# Altium PCB ESC.PcbDoc
Units mm, origin at the board's own origin, x right, y up, seen from the top; angles counter-clockwise.
Board outline 24 x 14 mm, 4 copper layers (Top Layer, GND, POWER, Bottom Layer), stack 0.778 mm thick; 43 components, 36 nets, 184 pads, 99 vias.
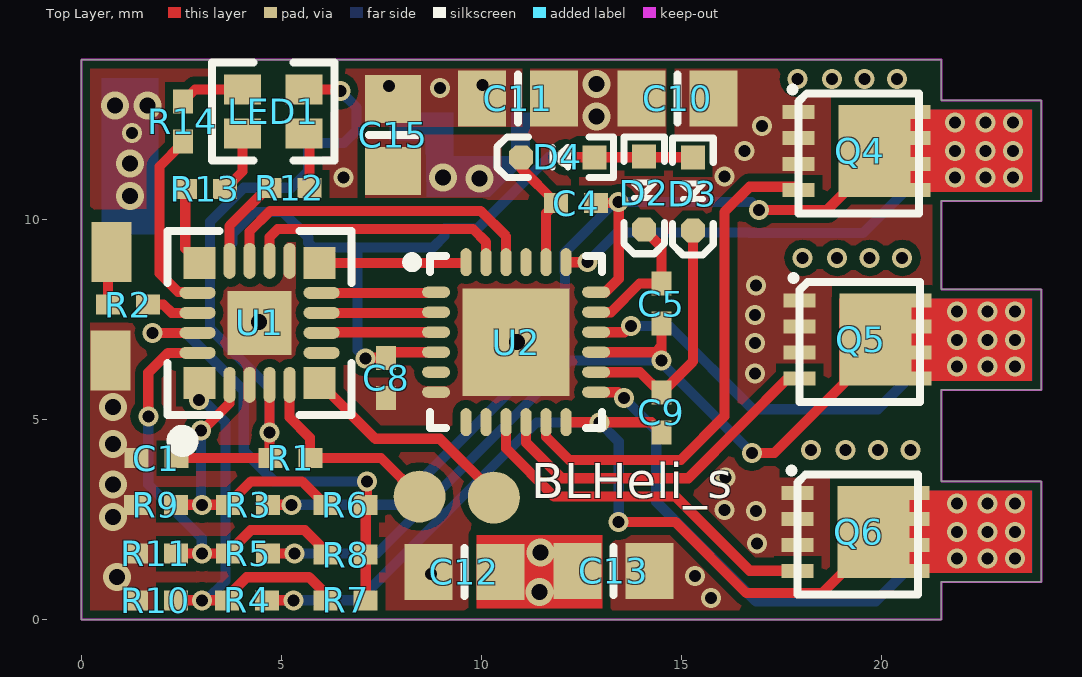
[diagram p0: Top Layer view]
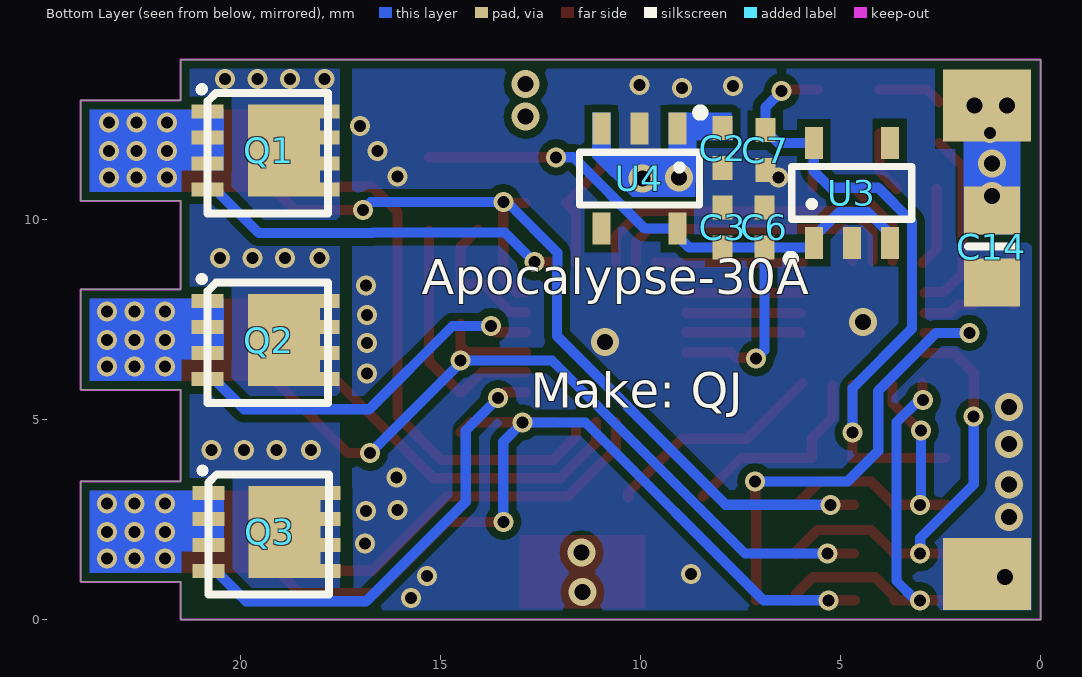
[diagram p1: Bottom Layer view, seen from below]
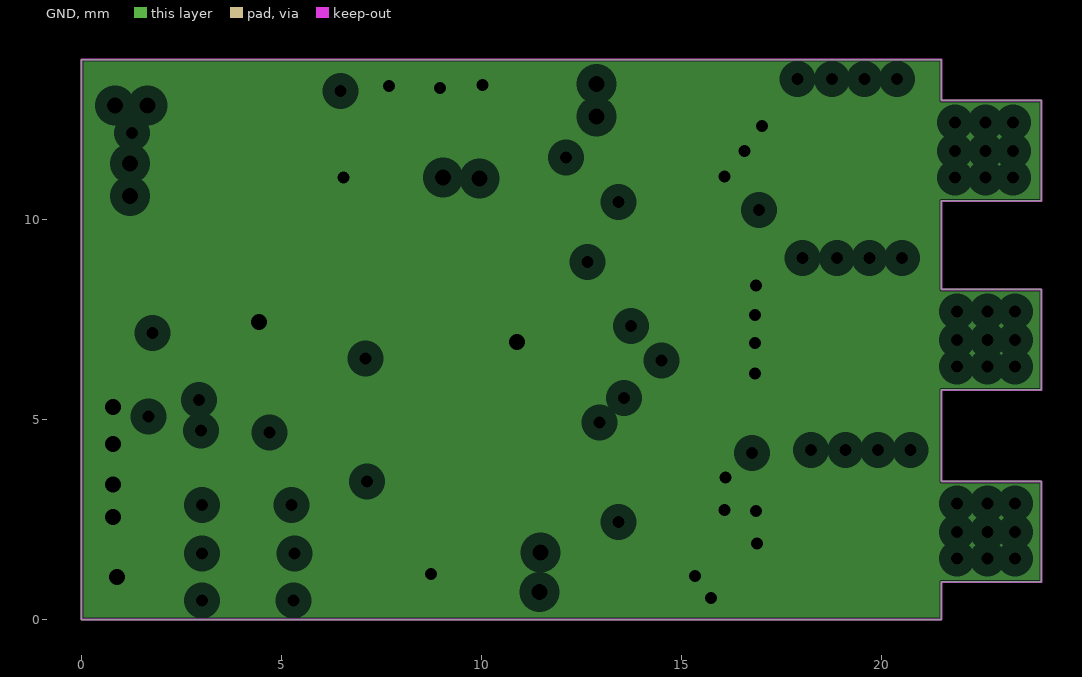
[diagram p2: GND, clearances drawn from the general rule]
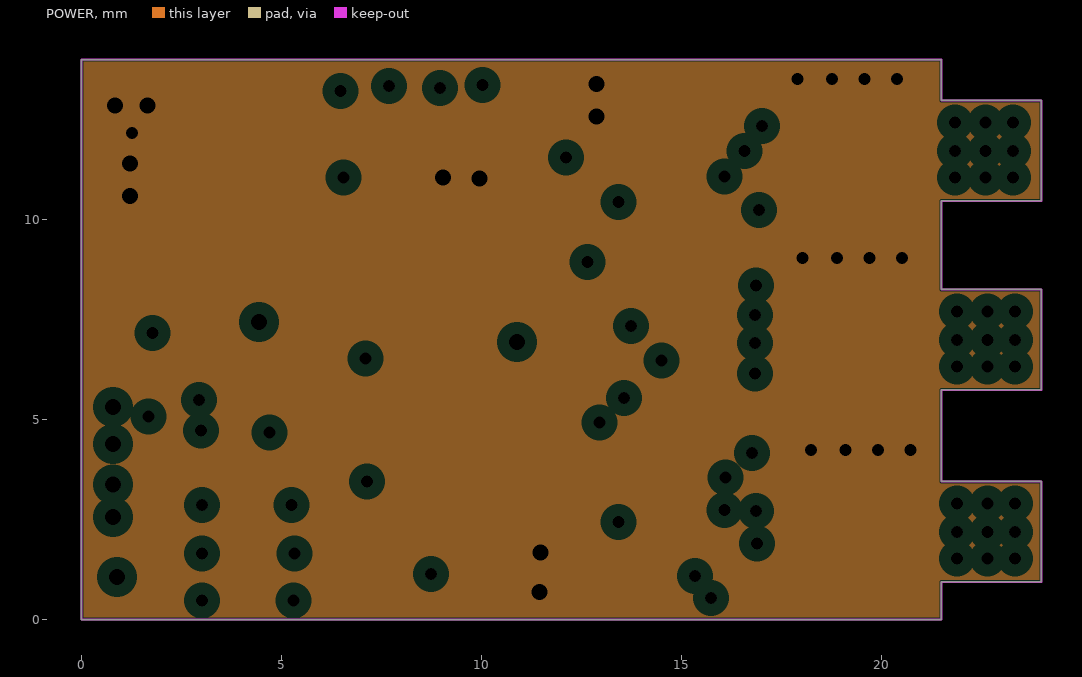
[diagram p3: POWER, clearances drawn from the general rule]
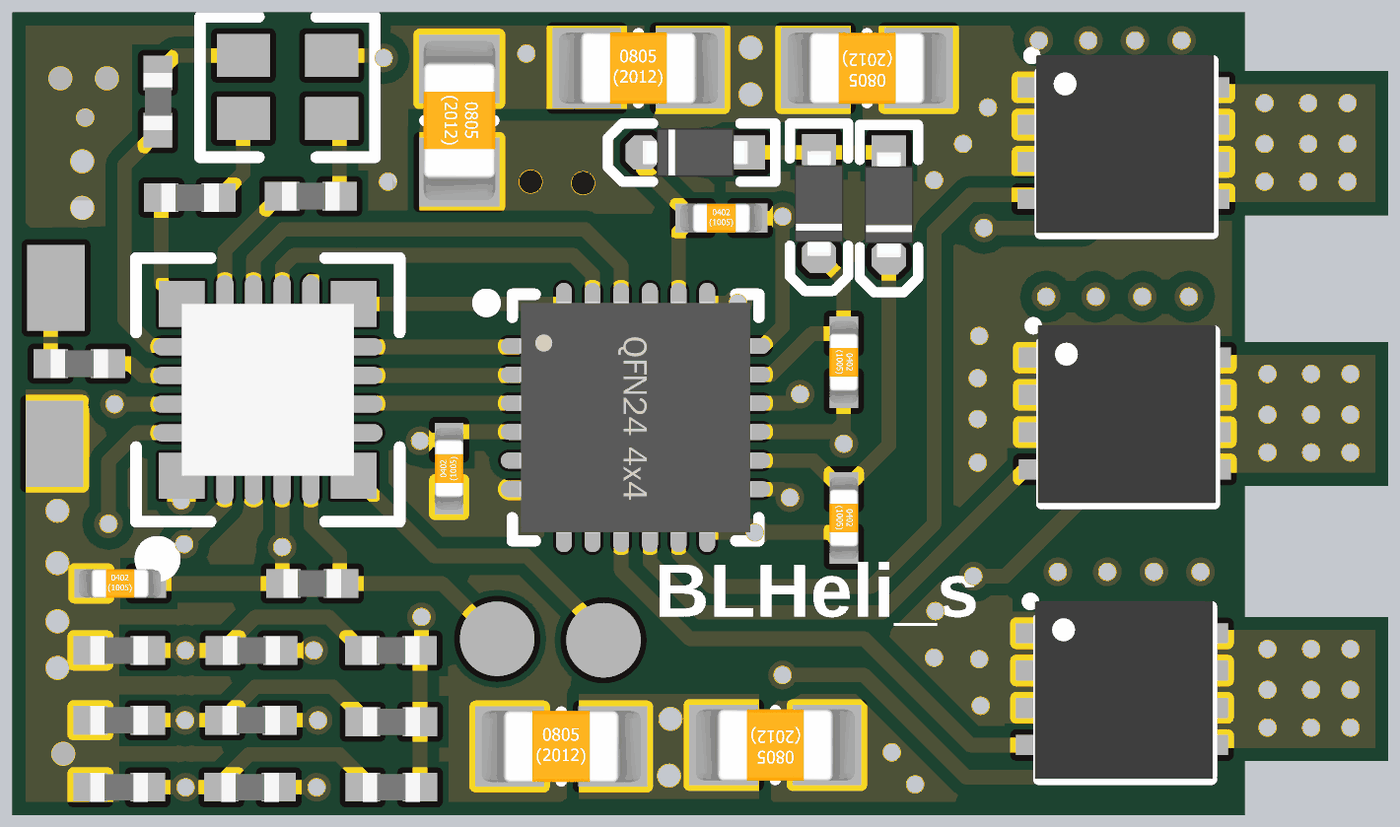
[diagram p4: 3D render of the assembled board from above, using the file's embedded part models]
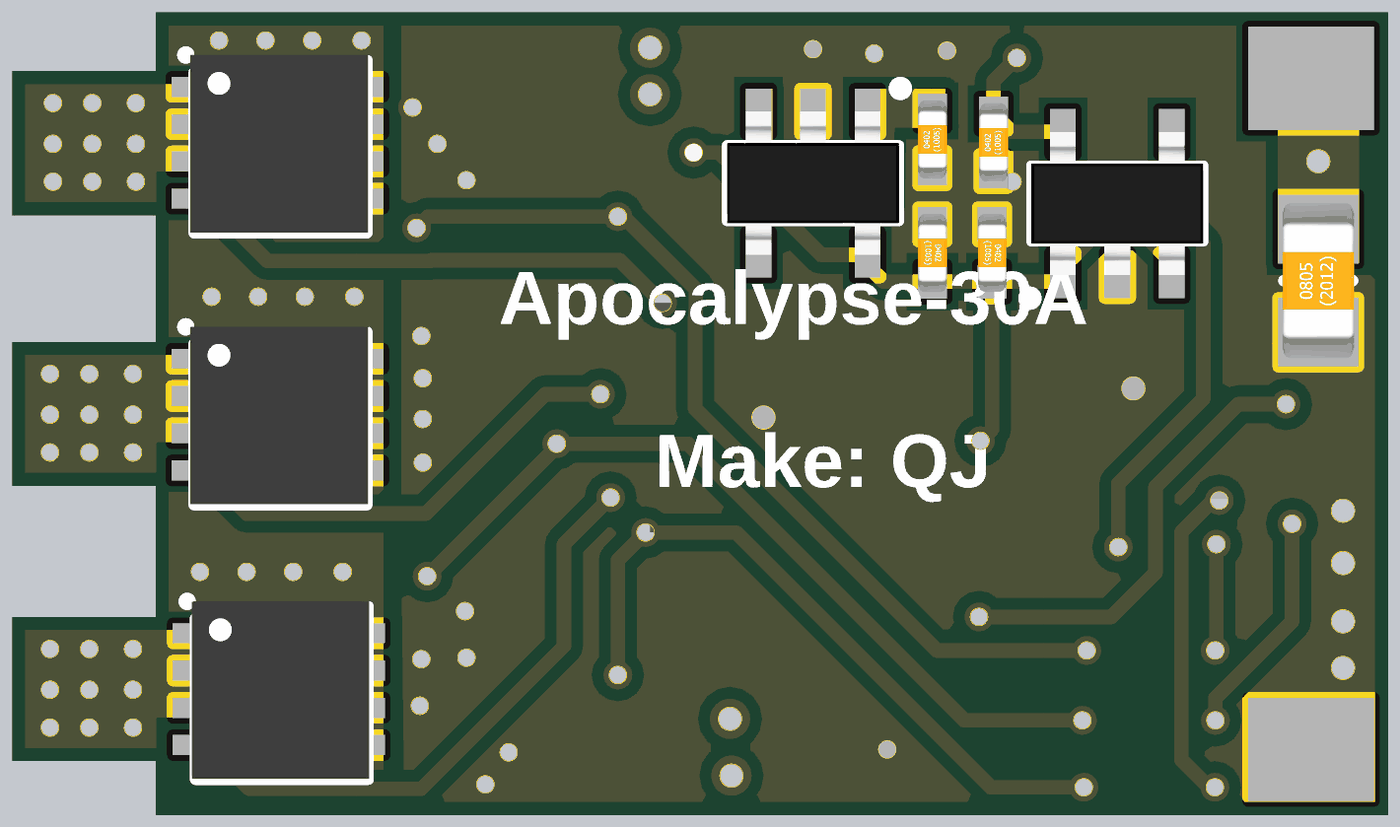
[diagram p5: 3D render of the assembled board from below, using the file's embedded part models]

## Layer stack, top to bottom
Top Solder: solder mask 0.0102, Solder Resist, Dk 3.5
Top Layer: signal copper 0.0356
Dielectric 1: core 0.254, FR-4, Dk 4.2
GND: plane copper 0.036, net GND
Dielectric 2: prepreg 0.127, Dk 4.2
POWER: plane copper 0.036, net BAT
Dielectric 3: core 0.254, Dk 4.2
Bottom Layer: signal copper 0.0356
Bottom Solder: solder mask 0.0102, Solder Resist, Dk 3.5

## Board outline
0,0 21.5,0 21.5,0.94 24,0.94 24,3.454 21.5,3.454 21.5,5.74 24,5.74 24,8.255 21.5,8.255 21.5,10.465 24,10.465 24,12.979 21.5,12.979 21.5,14 0,14

## Design rules (kind name [scope] priority, off if disabled: settings)
Clearance [All] p1: gap=0.2
HoleToHoleClearance [All] p1 off: gap=0.254 allowstackedmicrovias=TRUE
LayerPairs [All] p1 off: enforce=TRUE
MinimumSolderMaskSliver [All] p1 off: minsoldermaskwidth=0.254
NetAntennae [All] p1 off: netantennaetolerance=0
PlaneClearance [All] p1: clearance=0.3
PlaneConnect [All] p1: planeconnectstyle=Direct reliefexpansion=0.508 reliefentries=4 reliefconductorwidth=0.254 reliefairgap=0.254
PolygonConnect [All] p1: connectstyle=Direct reliefconductorwidth=0.254 reliefentries=4 polygonreliefangle="90 Angle" airgapwidth=0.254
RoutingVias [All] p1: holewidth=0.3 width=0.5 viastyle="Through Hole" minholewidth=0.3 minwidth=0.5 maxholewidth=0.4 maxwidth=0.7
SilkToSilkClearance [All] p1 off: silktosilkclearance=0.254
SilkToSolderMaskClearance [IsPad] p1 off: minsilkscreentomaskgap=0.254 clearancetoexposedcopper=TRUE
SolderMaskExpansion [All] p1: expansion=0.102
Width [All] p1: maxlimit=0.5 minlimit=0.254 preferedwidth=0.254
22 further rules are at their usual default settings.

## Components (designator, comment, footprint, x,y, rotation, side; value= is the part's Value field where it differs from the comment)
C1 "104" 0402-C-1.6*0.5 1.88,4.039 r0 top
C2 "0.1uf" 0402-C-1.6*0.5 7.95,11.786 r90 bottom
C3 "0.1uf" 0402-C-1.6*0.5 7.95,9.804 r270 bottom
C4 "0.1uf" 0402-C-1.6*0.5 12.37,10.414 r0 top
C5 "0.1uf" 0402-C-1.6*0.5 14.503,7.899 r270 top
C6 "0.1uf" 0402-C-1.6*0.5 6.909,9.804 r270 bottom
C7 "0.1uf" 0402-C-1.6*0.5 6.883,11.735 r90 bottom
C8 "0.1uf" 0402-C-1.6*0.5 7.62,6.045 r90 top
C9 "0.1uf" 0402-C-1.6*0.5 14.503,5.182 r270 top
C10 "47uf" 0805-C-3.0*1.4 14.91,13.03 r180 top
C11 "47uf" 0805-C-3.0*1.4 10.922,13.03 r0 top
C12 "47uf" 0805-C-3.0*1.4 9.576,1.194 r0 top
C13 "47uf" 0805-C-3.0*1.4 13.31,1.219 r180 top
C14 "47uf" 0805-C-3.0*1.4 1.219,9.322 r90 bottom
C15 "47uf" 0805-C-3.0*1.4 7.798,12.116 r270 top
D2 "1N4148WT" L_SOD523 14.072,10.668 r270 top
D3 "1N4148WT" L_SOD523 15.291,10.643 r270 top
D4 "1N4148WT" L_SOD523 11.913,11.557 r180 top
LED1 "RGB-0603" LC-0603_Rx2 4.801,12.7 r270 top
Q1 "TPN2R703NL" 8-PowerVDFN 19.301,11.76 r180 bottom
Q2 "TPN2R703NL" 8-PowerVDFN 19.301,7.017 r180 bottom
Q3 "TPN2R703NL" 8-PowerVDFN 19.278,2.226 r180 bottom
Q4 "TPN2R703NL" 8-PowerVDFN 19.457,11.751 r0 top
Q5 "TPN2R703NL" 8-PowerVDFN 19.482,7.036 r0 top
Q6 "TPN2R703NL" 8-PowerVDFN 19.432,2.226 r0 top
R1 "10K" 0402-R-1.6*0.5 5.232,4.039 r0 top
R2 "4.7K" 0402-R-1.6*0.5 1.168,7.874 r0 top
R3 "47K" 0402-R-1.6*0.5 4.174,2.87 r180 top
R4 "47K" 0402-R-1.6*0.5 4.148,0.483 r180 top
R5 "47K" 0402-R-1.6*0.5 4.166,1.651 r180 top
R6 "10K" 0402-R-1.6*0.5 6.604,2.87 r180 top
R7 "10K" 0402-R-1.6*0.5 6.612,0.483 r180 top
R8 "10K" 0402-R-1.6*0.5 6.612,1.626 r180 top
R9 "4.7K" 0402-R-1.6*0.5 1.862,2.87 r180 top
R10 "4.7K" 0402-R-1.6*0.5 1.862,0.483 r180 top
R11 "4.7K" 0402-R-1.6*0.5 1.862,1.651 r180 top
R12 "10K" 0402-R-1.6*0.5 5.207,10.795 r0 top
R13 "10K" 0402-R-1.6*0.5 3.099,10.77 r0 top
R14 "10K" 0402-R-1.6*0.5 2.54,12.446 r90 top
U1 "EFM8BB21" EFM8BB21F16G-C-QFN20 4.457,7.417 r0 top
U2 "FD6288" LC-QFN-24_4x4x05P 10.871,6.934 r270 top
U3 "SPX3819M5-3.3V" "L - SOT23-5L" 4.724,10.668 r180 bottom
U4 "SPX3819M5-5.0V" "L - SOT23-5L" 10.033,11.024 r0 bottom

## Footprints (in the part's own frame and the unit in brackets; to place one, negate y for a bottom-side part, rotate by r counter-clockwise, add the part's x,y. Pads: shape width x height; smd on the part's side, far side on the other; paste and mask are expansions set on the pad)
8-PowerVDFN [mm]
  rect 0.8x0.35 smd: 1(-1.525,-0.357) 1(-1.525,0.293) 1(-1.525,0.943) 2(-1.525,-1.007)
  rect 1.8x2.3 smd: 3(0.378,-0.032)
  rect 0.5x0.35 smd: 3(1.525,-1.007) 3(1.525,-0.357) 3(1.525,0.293) 3(1.525,0.943)
  silkscreen extent -1.67,-1.6 1.49,1.5, body extent -1.6,-1.6 1.52,1.5, height 0.8
0402-C-1.6*0.5 [mm]
  rect 0.6x0.5 smd: 1(-0.5,0) 2(0.5,0)
  body extent -0.73,-0.25 0.73,0.25, height 0.49
0402-R-1.6*0.5 [mm]
  rect 0.6x0.5 smd: 1(-0.5,0) 2(0.5,0)
  body extent -0.5,-0.25 0.5,0.25, height 0.25
0805-C-3.0*1.4 [mm]
  rect 1.2x1.4 smd: 1(-0.9,0) 2(0.9,0)
  silkscreen extent 0,-0.6 0,0.6, body extent -1.4,-0.62 1.4,0.63, height 0.79
EFM8BB21F16G-C-QFN20 [mm]
  rect 0.8x0.8 smd mask+0.051: 1(-1.5,-1.5) 6(1.5,-1.5) 11(1.5,1.5) 16(-1.5,1.5)
  oval 0.3x0.9 smd mask+0.051: 2(-0.75,-1.55) 3(-0.25,-1.55) 4(0.25,-1.55) 5(0.75,-1.55) 12(0.75,1.55) 13(0.25,1.55) 14(-0.25,1.55) 15(-0.75,1.55)
  oval 0.9x0.3 smd mask+0.051: 7(1.55,-0.75) 8(1.55,-0.25) 9(1.55,0.25) 10(1.55,0.75) 17(-1.55,0.75) 18(-1.55,0.25) 19(-1.55,-0.25) 20(-1.55,-0.75)
  rect 1.6x1.6 smd mask+0.051: 21(0,0)
  silkscreen extent -2.3,-3.15 2.3,2.3, body extent -1.5,-1.5 1.5,1.5, height 0.62
"L - SOT23-5L" [mm]
  rect 0.45x0.8 smd: 1(-0.95,-1.25) 2(0,-1.25) 3(0.95,-1.25) 4(0.95,1.25) 5(-0.95,1.25)
  silkscreen extent -1.6,-1.73 1.5,0.66, body extent -1.5,-1.25 1.5,1.25, height 1.08
L_SOD523 [mm]
  rect 0.6x0.6 smd: 1(-0.915,0)
  oct 0.6x0.6 smd: 2(0.915,0)
  silkscreen extent -1.4,-0.51 1.52,0.51, body extent -0.91,-0.42 0.92,0.42, height 0.71
LC-0603_Rx2 [mm]
  rect 0.75x0.93 smd: 1(-0.55,-0.77) 2(0.55,-0.77) 3(0.55,0.77) 4(-0.55,0.77)
  silkscreen extent -1.22,-1.53 1.22,1.53
LC-QFN-24_4x4x05P [mm]
  rect 2.68x2.68 smd mask+0.051: 0(0,0)
  oval 0.28x0.7 smd mask+0.051: 1(-1.25,-2) 2(-0.75,-2) 3(-0.25,-2) 4(0.25,-2) 5(0.75,-2) 6(1.25,-2) 13(1.25,2) 14(0.75,2) 15(0.25,2) 16(-0.25,2) 17(-0.75,2) 18(-1.25,2)
  oval 0.7x0.28 smd mask+0.051: 7(2,-1.25) 8(2,-0.75) 9(2,-0.25) 10(2,0.25) 11(2,0.75) 12(2,1.25) 19(-2,1.25) 20(-2,0.75) 21(-2,0.25) 22(-2,-0.25) 23(-2,-0.75) 24(-2,-1.25)
  silkscreen extent -2.15,-2.72 2.15,2.15, body extent -2.01,-2.01 2.01,2.01, height 0.95

## Part data
C1: library part C, "无极性贴片电容"
C2 C3 C4 C5 C6 C7 C8 C9 C10 C11 C12 C13 C14 C15: library part C
LED1: library part LED-RGB-3528, "三基色LED"
R1 R3 R4 R5 R6 R7 R8 R9 R10 R11 R12 R13 R14: library part R
R2: library part R, "贴片电阻"
U3 U4: library part SPX3819M5

## Free pads (board coordinates)
  round 1.3 smd: 2(8.458,3.073) 3(10.312,3.048)
  rect 2.2x1.8 smd far side: 6(1.346,1.143) 7(1.346,12.852)
  rect 1x1.5 smd: 8(0.737,6.477) 9(0.762,9.195)

## Via types
v1: diameter 0.5, hole 0.3, Top Layer to Bottom Layer, tented both sides, 82 vias
v2: diameter 0.7, hole 0.4, Top Layer to Bottom Layer, tented both sides, 17 vias

## Nets (pads, with @x,y where several pads share a name; then routed paths per layer and width w, separated by ;. In a path a pad name is that pad's centre, name@x,y a point inside that pad or via, vN(x,y) a via of type N, cw(c..) or ccw(c..) an arc to the next point about the centre after c; other vN are vias at no path point)
3.3V: C1.2 C7.2 LED1.4 R1.1 U1.4 U3.5 | length 17.2
  Top Layer w0.254: C1.2 R1.1 4.707,4.064 v1(4.707,4.674) U1.4 ; LED1.4 6.435,13.25 v1(6.477,13.208)
  Bottom Layer w0.254: v1(4.707,4.674) 4.707,5.783 3.222,7.268 3.222,9.953 4.064,10.795 5.258,10.795 5.674,11.212 U3.5 6.567,11.918 C7.2 6.883,12.802 v1(6.477,13.208)
5V: C3.2 C6.2 C8.2 D2.1 D3.1 D4.1 U2.4 U3.1 U3.3 U4.5 | length 18.1
  Top Layer w0.254: v1(7.112,6.528) 7.129,6.545 C8.2 7.759,6.684 U2.4 ; v1(12.116,11.557) D4.1 ; D4.1 D3.1
  Bottom Layer w0.254: U3.3 3.774,9.642 4.318,10.185 5.044,10.185 5.674,9.555 U3.1 5.788,9.304 C6.2 ; v1(7.112,6.528) 6.909,6.731 C6.2 ; v1(12.116,11.557) 11.679,11.557 9.896,9.774 U4.5 9.083,9.591 8.796,9.304 C3.2 C6.2
A: C4.2 Q1.1 Q4.3 R3.1 U2.18 | length 23.6
  Top Layer w0.254: R3.1 v1(5.258,2.87) ; U2.18@12.87,8.186 U2.18 13.1,8.184 13.437,8.521 v1(13.437,10.439) 13.411,10.414 C4.2 ; v1(16.948,10.242) 18.65,10.242 19.835,11.428 Q4.3@19.835,11.719
  Bottom Layer w0.254: v1(5.258,2.87) 7.874,2.87 12.09,7.087 12.09,8.684 12.079,8.695 12.079,9.173 13.345,10.439 v1(13.437,10.439) 16.751,10.439 v1(16.948,10.242)
  other v1: 21.844,11.049 22.606,11.049 23.292,11.049 21.844,11.709 22.606,11.709 23.292,11.709 21.844,12.421 22.606,12.421 23.292,12.421
A_IN: R3.2 R6.2 R9.1 U1.2 | length 7.5
  Top Layer w0.254: R9.1 v1(3.018,2.87) R3.2 3.674,2.883 4.245,3.454 5.52,3.454 R6.2 ; v1(2.997,4.724) 3.026,4.724 3.707,5.405 U1.2
  Bottom Layer w0.254: v1(2.997,4.724) 2.997,2.891 v1(3.018,2.87)
AC_L: U1.10 U2.1 | length 2.9
  Top Layer w0.254: U1.10 8.854,8.167 U2.1
AP_H: U1.14 U2.22 | length 8.3
  Top Layer w0.254: U1.14 4.207,9.7 4.725,10.218 9.982,10.218 10.621,9.579 U2.22
B: C5.2 Q2.1 Q5.3 R5.1 U2.15 | length 22.1
  Top Layer w0.254: R5.1 v1(5.334,1.651) ; U2.15 14.355,6.684 14.503,6.833 ; v1(14.503,6.477) 14.503,6.833 ; C5.2 14.503,6.833 ; v1(16.764,4.166) 17.323,4.166 19.86,6.703 Q5.3@19.86,7.004
  Bottom Layer w0.254: v1(5.334,1.651) 7.391,1.651 12.217,6.477 v1(14.503,6.477) 14.503,6.426 v1(16.764,4.166)
  other v1: 21.895,6.325 22.657,6.325 23.343,6.325 21.895,6.985 22.657,6.985 23.343,6.985 21.895,7.696 22.657,7.696 23.343,7.696
B_IN: R5.2 R8.2 R11.1 U1.20 | length 10.8
  Top Layer w0.254: v1(1.676,5.08) 1.676,6.172 2.172,6.667 U1.20 ; R11.1 v1(3.014,1.651) R5.2 3.666,1.663 4.237,2.235 5.588,2.235 6.112,1.711 R8.2
  Bottom Layer w0.254: v1(1.676,5.08) 1.676,3.378 3.014,2.041 v1(3.014,1.651)
BAT: C2.2 C10.2 C11.2 C12.2 C13.2 C14.2 C15.2 pad.7 Q1.3 Q2.3 Q3.3 U4.1 U4.3
  other v1: 18.237,4.242 19.101,4.242 19.914,4.242 20.726,4.242 18.034,9.042 18.898,9.042 19.71,9.042 20.523,9.042 1.27,12.167 17.907,13.513 18.771,13.513 19.583,13.513 20.396,13.513
  other v2: 11.455,0.686 11.481,1.676 1.219,10.592 9.957,11.024 9.042,11.049 1.219,11.405 12.878,12.573 0.838,12.852 1.651,12.852 12.878,13.386
BC_L: U1.9 U2.2 | length 2.9
  Top Layer w0.254: U1.9 8.854,7.667 U2.2
BP_H: U1.13 U2.23 | length 6.7
  Top Layer w0.254: U1.13 4.707,9.558 4.913,9.764 9.794,9.764 10.121,9.437 U2.23
C: C9.2 Q3.1 Q6.3 R4.1 U2.12 | length 23.2
  Top Layer w0.254: R4.1 v1(5.309,0.483) ; U2.12 14.251,4.934 C9.2 ; v1(13.437,2.442) 14.849,2.442 16.63,0.66 18.517,0.66 19.81,1.954 Q6.3@19.81,2.194
  Bottom Layer w0.254: v1(5.309,0.483) 6.934,0.483 11.379,4.928 v1(12.954,4.928) 13.437,4.445 v1(13.437,2.442)
  other v1: 21.895,1.524 22.657,1.524 23.343,1.524 21.895,2.184 22.657,2.184 23.343,2.184 21.895,2.896 22.657,2.896 23.343,2.896
C_IN: R4.2 R7.2 R10.1 U1.1 | length 10.4
  Top Layer w0.254: R10.1 v1(3.023,0.483) R4.2 R4.2@3.648,0.545 ; U1.1@2.946,5.537 U1.1 ; R4.2@3.648,0.57 4.137,1.06 5.697,1.06 6.112,0.644 R7.2
  Bottom Layer w0.254: v1(2.946,5.486) 3.051,5.486 3.607,4.931 3.607,0.965 3.124,0.483 v1(3.023,0.483)
CC_L: U1.8 U2.3 | length 2.9
  Top Layer w0.254: U1.8 6.024,7.184 U2.3
CENTER: R6.1 R7.1 R8.1 U1.19 | length 11.9
  Top Layer w0.254: v1(1.783,7.167) U1.19 ; R7.1 R8.1 7.112,2.862 R6.1 7.137,2.904 v1(7.137,3.454)
  Bottom Layer w0.254: v1(1.783,7.167) 2.612,7.167 4.061,5.718 4.061,4.22 4.826,3.454 v1(7.137,3.454)
CP_H: U1.11 U2.24 | length 3.7
  Top Layer w0.254: U1.11 9.604,8.917 U2.24
GND: C1.1 C2.1 C3.1 C6.1 C7.1 C8.1 C10.1 C11.1 C12.1 C13.1 C14.1 C15.1 pad.6 pad.8 Q4.1 Q5.1 Q6.1 R9.2 R10.2 R11.2 U1.3 U1.12 U1.21 U2.0 U2.6 U3.2 U4.2
  other v1: 15.748,0.533 15.342,1.092 8.738,1.143 16.891,1.905 16.866,2.718 16.078,2.743 16.104,3.556 16.84,6.147 16.84,6.909 16.84,7.62 16.866,8.357 6.553,11.049 16.078,11.074 16.586,11.709 17.018,12.344 8.966,13.284 7.696,13.335 10.033,13.36
  other v2: 0.889,1.067 0.787,2.565 0.787,3.378 0.787,4.394 0.787,5.309 10.897,6.934 4.445,7.442
H01: Q1.2 U2.19 | length 9.5
  Top Layer w0.254: U2.19 v1(12.656,8.934)
  Bottom Layer w0.254: v1(12.656,8.934) 13.399,9.677 16.697,9.677 16.709,9.665 19.546,9.665 20.634,10.753 Q1.2
H02: Q2.2 U2.16 | length 9.2
  Top Layer w0.254: U2.16 13.585,7.184 v1(13.741,7.341)
  Bottom Layer w0.254: v1(13.741,7.341) 14.707,7.341 16.789,5.258 19.914,5.258 20.666,6.01 Q2.2
H03: Q3.2 U2.13 | length 11.5
  Top Layer w0.254: U2.13 13.417,5.684 v1(13.564,5.537)
  Bottom Layer w0.254: v1(13.564,5.537) 14.376,4.724 14.376,2.946 16.866,0.457 19.863,0.457 20.625,1.219 Q3.2
L01: Q4.2 U2.11 | length 12.8
  Top Layer w0.254: U2.11 11.621,4.564 12.197,3.988 14.986,3.988 16.078,5.08 16.078,10.189 16.709,10.819 17.857,10.819 Q4.2
L02: Q5.2 U2.10 | length 8.8
  Top Layer w0.254: U2.10 11.121,4.422 12.009,3.534 15.174,3.534 16.532,4.892 16.532,4.899 17.662,6.029 Q5.2
L03: Q6.2 U2.9 | length 9.2
  Top Layer w0.254: U2.9 10.621,4.274 11.822,3.073 14.859,3.073 16.713,1.219 Q6.2
LED0: R14.1 U1.17 | length 4.7
  Top Layer w0.254: R14.1@2.54,11.913 1.956,11.328 1.956,8.656 2.422,8.19 2.884,8.19 U1.17
LED1: R13.1 U1.16 | length 2
  Top Layer w0.254: R13.1 2.599,9.276 U1.16
LED2: R12.1 U1.15 | length 2.2
  Top Layer w0.254: U1.15 3.707,9.842 4.659,10.795 R12.1@4.682,10.795
NetC4_1: C4.1 D4.2 U2.20 | length 3.1
  Top Layer w0.254: D4.2 10.997,11.286 C4.1 11.621,10.165 U2.20
NetC5_1: C5.1 D2.2 U2.17 | length 3.5
  Top Layer w0.254: U2.17 13.242,7.684 13.957,8.399 C5.1 14.503,9.321 D2.2
NetC9_1: C9.1 D3.2 U2.14 | length 6.2
  Top Layer w0.254: U2.14 13.97,6.184 14.472,5.682 C9.1 14.524,5.682 15.291,6.448 D3.2
NetLED1_1: LED1.1 R14.2 | length 1.6
  Top Layer w0.254: R14.2 2.844,13.25 LED1.1
NetLED1_2: LED1.2 R13.2 | length 1.6
  Top Layer w0.254: R13.2 4.031,11.201 LED1.2
NetLED1_3: LED1.3 R12.2 | length 1.4
  Top Layer w0.254: LED1.3 5.707,12.014 R12.2
NetR1_2: pad.2 R1.2 U1.5 | length 5.2
  Top Layer w0.254: U1.5 5.207,5.055 5.715,4.547 5.715,4.056 R1.2 7.493,4.039 pad.2
NetR2_2: R2.2 U1.18 | length 1.3
  Top Layer w0.254: R2.2 2.057,7.874 2.264,7.667 U1.18
NetU1_6: pad.3 U1.6 | length 5.6
  Top Layer w0.254: U1.6 7.353,4.521 8.966,4.521 10.312,3.175 pad.3
PWM: pad.9 R2.1 | length 1.4
  Top Layer w0.254: R2.1 0.668,9.101 pad.9
pads on no net: U1.7 U2.5 U2.7 U2.8 U2.21 U3.4 U4.4

## Polygon pours and split planes (outlines as drawn)
BAT on Top Layer "BAT" (solid, remove dead copper, pour order 4): 0,10.236 14.884,10.541 14.884,14 0,14
GND on Top Layer "GND" (solid, remove dead copper, pour order 2): 0,14 0.012,13.988 21.5,13.988 21.5,0 0,0
BAT on Bottom Layer "BAT" (solid, remove dead copper, pour order 8): 17.526,14 17.538,13.988 21.5,13.988 21.5,0 21.484,-0.016 17.526,-0.016
GND on Bottom Layer "GND" (solid, remove dead copper, pour order 6): 0,14 17.602,14 17.526,13.924 17.526,-0.016 0.016,-0.016 0,0
GND on GND (split plane): 21.449,12.979 21.453,12.96 21.464,12.943 21.48,12.932 21.5,12.928 23.949,12.928 23.949,10.516 21.5,10.516 21.48,10.512 21.464,10.501 21.453,10.484 21.449,10.465 21.449,8.255 21.453,8.235 21.464,8.219 21.48,8.208 21.5,8.204 23.949,8.204 23.949,5.791 21.5,5.791 21.48,5.787 21.464,5.776 21.453,5.76 21.449,5.74 21.449,3.454 21.453,3.435 21.464,3.418 21.48,3.407 21.5,3.403 23.949,3.403 23.949,0.991 21.5,0.991 21.48,0.987 21.464,0.976 21.453,0.959 21.449,0.94 21.449,0.051 0.051,0.051 0.051,13.949 21.449,13.949
BAT on POWER (split plane): 21.449,12.979 21.453,12.96 21.464,12.943 21.48,12.932 21.5,12.928 23.949,12.928 23.949,10.516 21.5,10.516 21.48,10.512 21.464,10.501 21.453,10.484 21.449,10.465 21.449,8.255 21.453,8.235 21.464,8.219 21.48,8.208 21.5,8.204 23.949,8.204 23.949,5.791 21.5,5.791 21.48,5.787 21.464,5.776 21.453,5.76 21.449,5.74 21.449,3.454 21.453,3.435 21.464,3.418 21.48,3.407 21.5,3.403 23.949,3.403 23.949,0.991 21.5,0.991 21.48,0.987 21.464,0.976 21.453,0.959 21.449,0.94 21.449,0.051 0.051,0.051 0.051,13.949 21.449,13.949

## Keep-outs
Keep-Out Layer:
  lines w0.05: 21.488,14 21.5,13.988 21.5,12.979 24,12.979 24,10.465 21.5,10.465 21.5,8.255 24,8.255 24,5.74 21.5,5.74 21.5,3.454 24,3.454 24,0.94 21.5,0.94 21.5,0 0,0 0,14 21.5,14

## Other copper
Top Layer:
  rectangle net BAT: 9.881,0.279 13.03,2.108
  rectangle net C: 18.948,1.168 23.774,3.226
  rectangle net B: 18.948,5.969 23.774,8.026
  rectangle net A: 18.948,10.693 23.774,12.751
  pour cut-out: 17.45,3.544 19.665,3.544 19.665,4.03 17.45,4.03
  pour cut-out: 14.834,14 14.834,12.04 14.783,12.04 14.783,12.09 14.783,14
  pour cut-out: 14.783,12.04 12.395,12.04 12.395,12.09 12.446,12.09 14.783,12.09
  pour cut-out: 12.446,12.09 12.446,10.49 12.395,10.49 12.395,10.973 12.395,12.09
  pour cut-out: 11.074,14.021 11.074,12.268 11.024,12.268 11.024,12.319 11.024,14.021
  pour cut-out: 6.96,12.319 11.024,12.319 11.024,12.268 8.788,12.268 6.96,12.268
  pour cut-out: 6.96,12.319 6.96,10.439 6.909,10.439 6.909,10.49 6.909,12.319
  pour cut-out: 6.909,10.49 12.446,10.49 12.446,10.439 8.738,10.439 6.909,10.439
Bottom Layer:
  rectangle net BAT: 0.508,9.627 1.93,13.538
  region net C: 20.422,3.226 20.523,3.226 23.774,3.226 23.774,1.168 21.488,1.168 21.488,1.676 21.463,1.702 20.422,1.702
  region net B: 20.422,8.026 20.523,8.026 23.774,8.026 23.774,5.969 21.488,5.969 21.488,6.477 21.463,6.502 20.422,6.502
  region net A: 20.422,12.751 20.523,12.751 23.774,12.751 23.774,10.693 21.488,10.693 21.488,11.201 21.463,11.227 20.422,11.227
  region net BAT: 8.636,10.566 10.217,10.566 11.207,11.556 11.207,12.675 10.744,12.675 10.744,11.582 9.3,11.582 9.296,12.675 7.722,12.675 7.696,11.989 8.611,11.989
  pour cut-out: 17.161,-0.016 17.526,-0.016 17.526,4.791 17.526,13.919 17.216,13.919 17.216,4.611

## Silkscreen, mask and mechanical layers (free items; w line width, h text height)
Top Overlay:
  text "BLHeli_s" at 11.252,2.743 h1.5
Bottom Overlay:
  text "Apocalypse-30A" at 15.469,7.849 h1.5
  text "Make: QJ" at 12.751,5.004 h1.5